# Altium PCB SR_Träger.PcbDoc
Units mm, origin at the board's own origin, x right, y up, seen from the top; angles counter-clockwise.
Board outline 89.25 x 72.75 mm, 2 copper layers (Top Layer, Bottom Layer); 53 components, 43 nets, 189 pads, 242 vias.
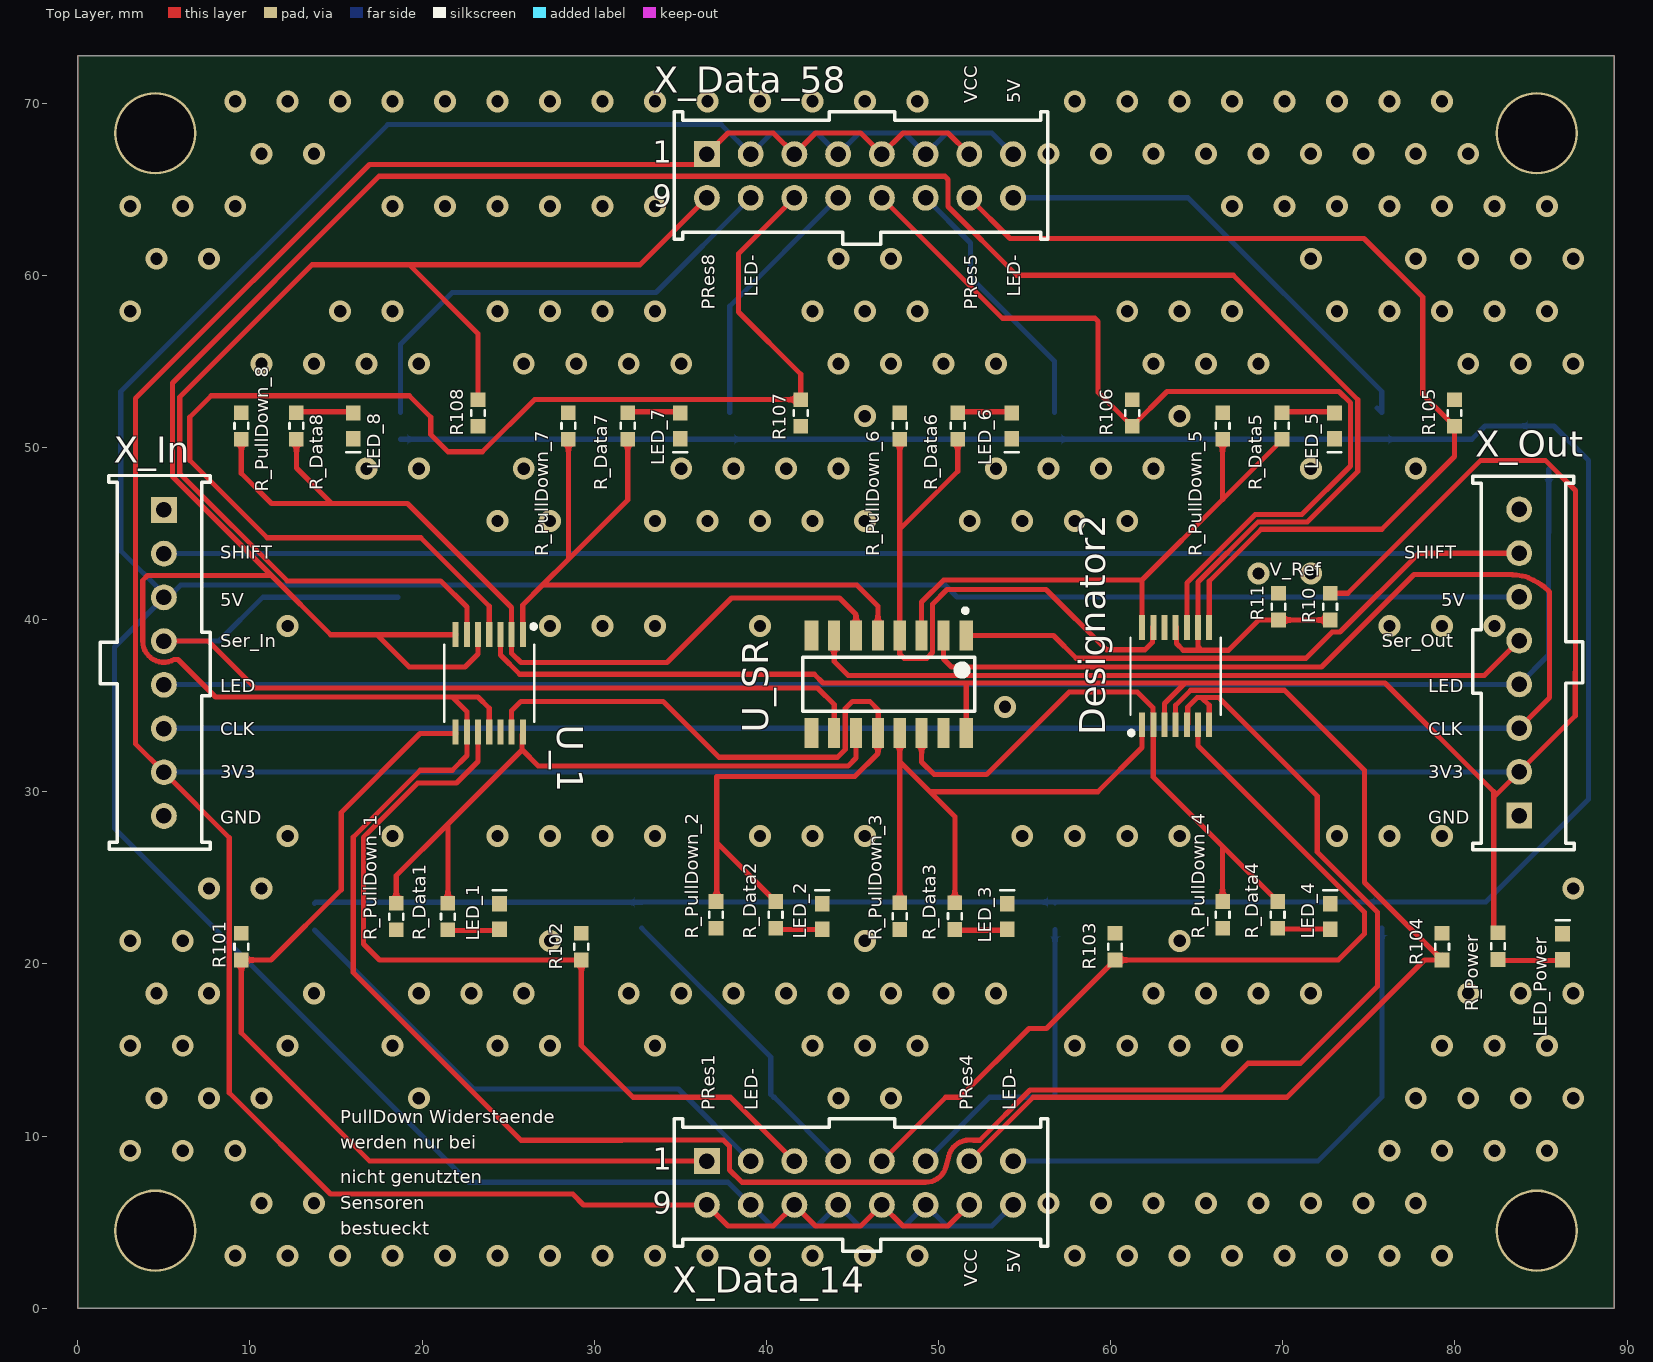
[diagram p0: Top Layer view]
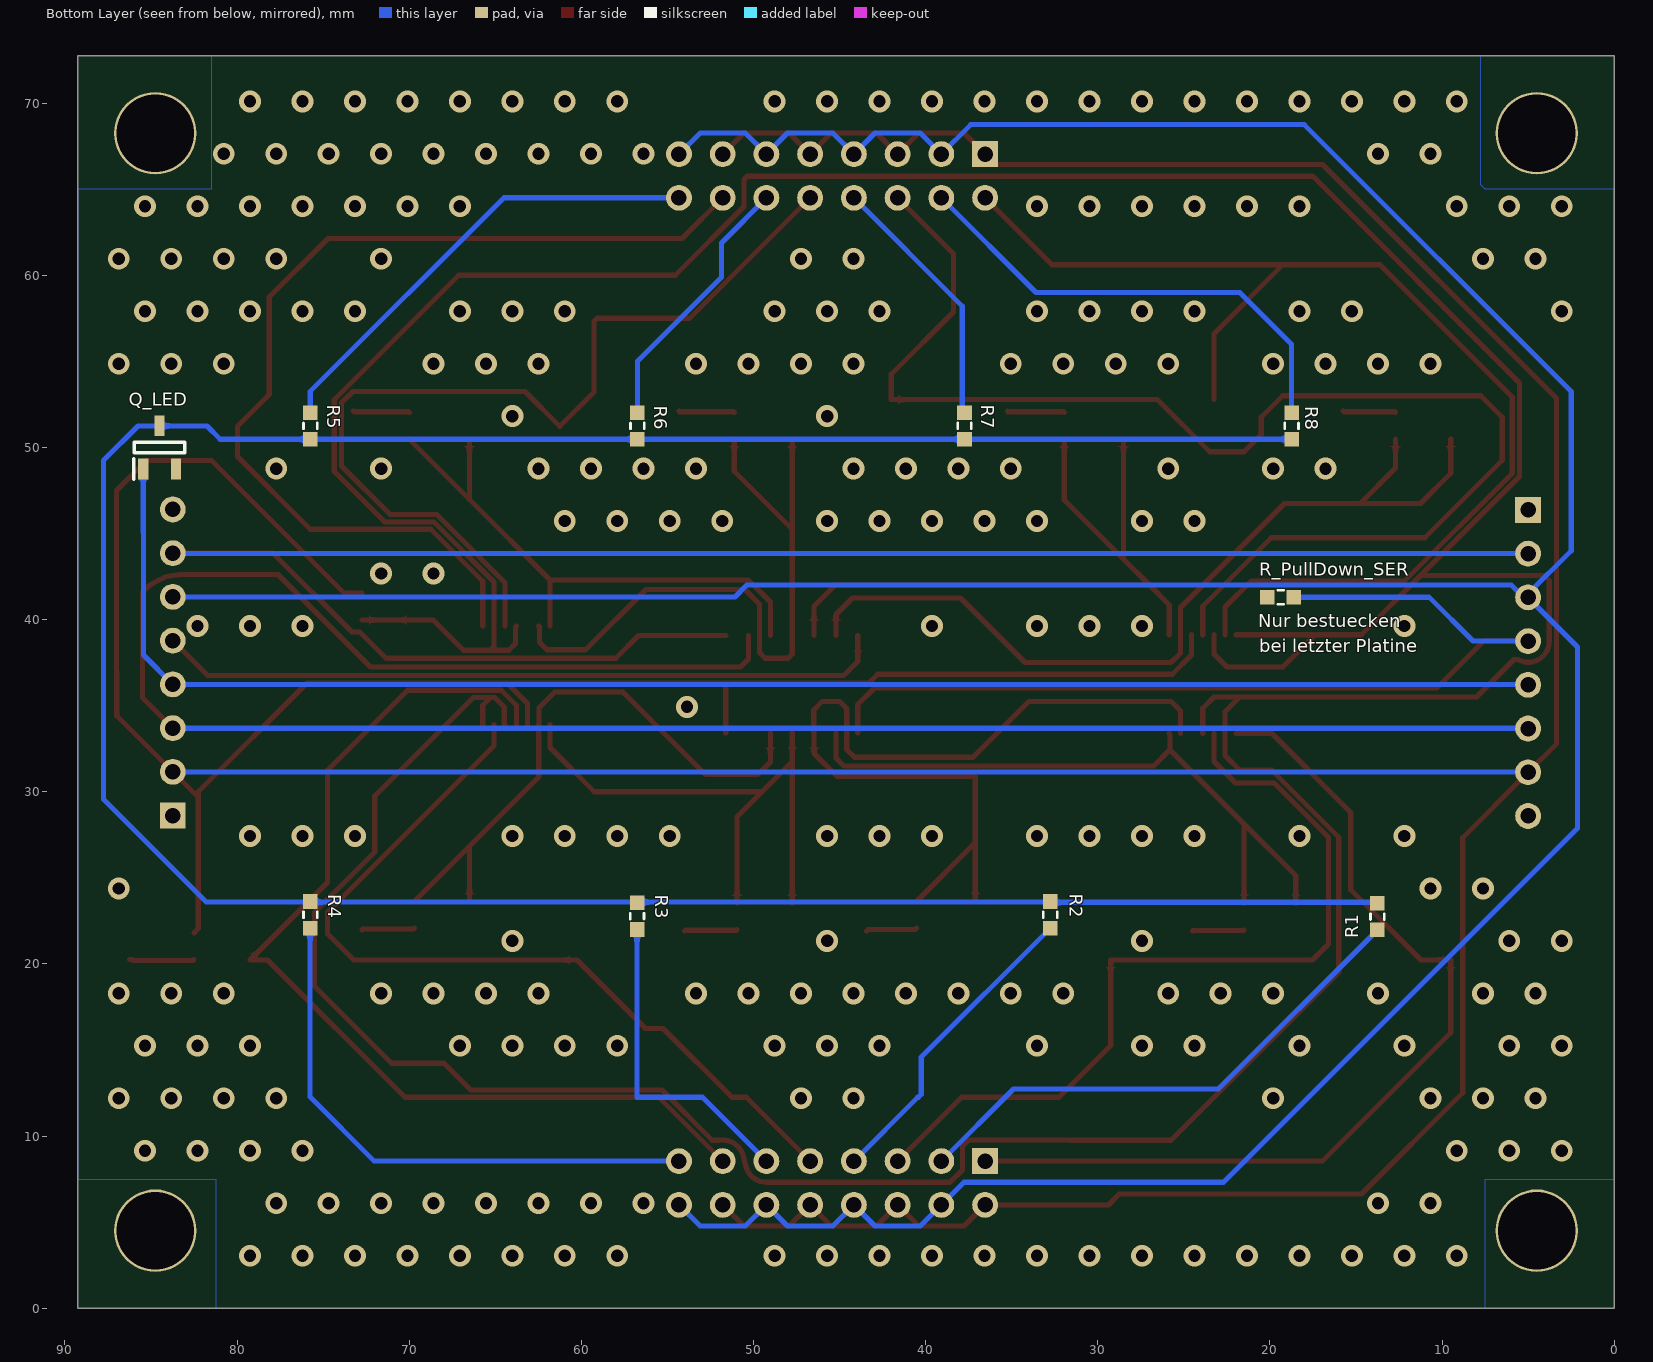
[diagram p1: Bottom Layer view, seen from below]
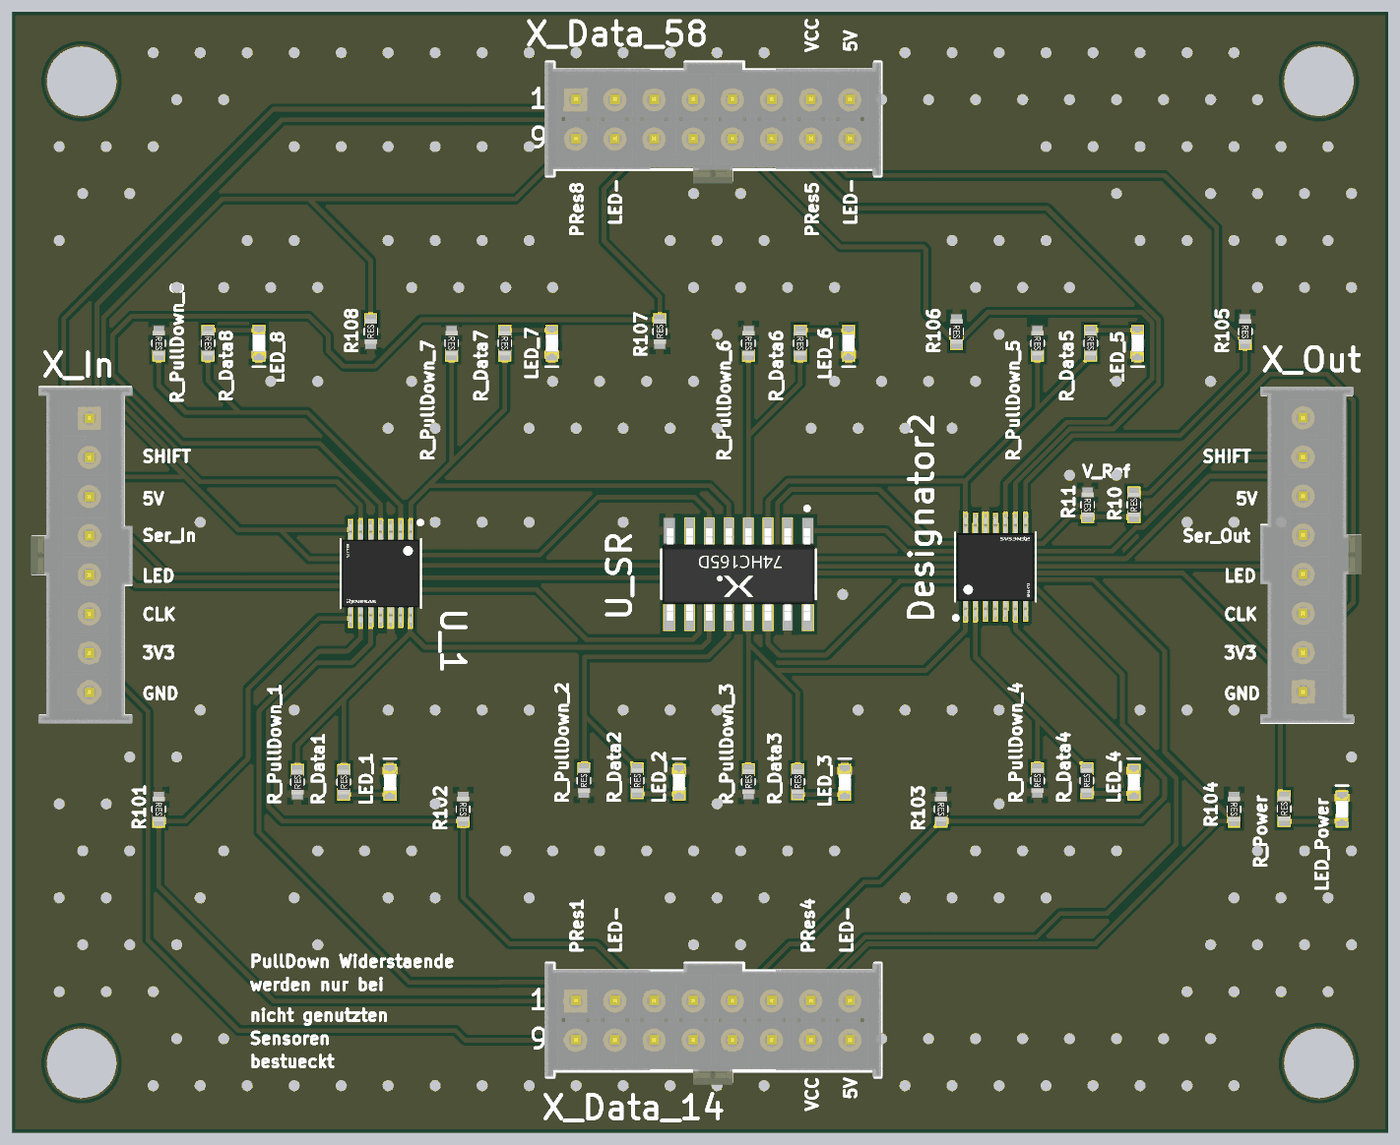
[diagram p2: 3D render of the assembled board from above, using the file's embedded part models]
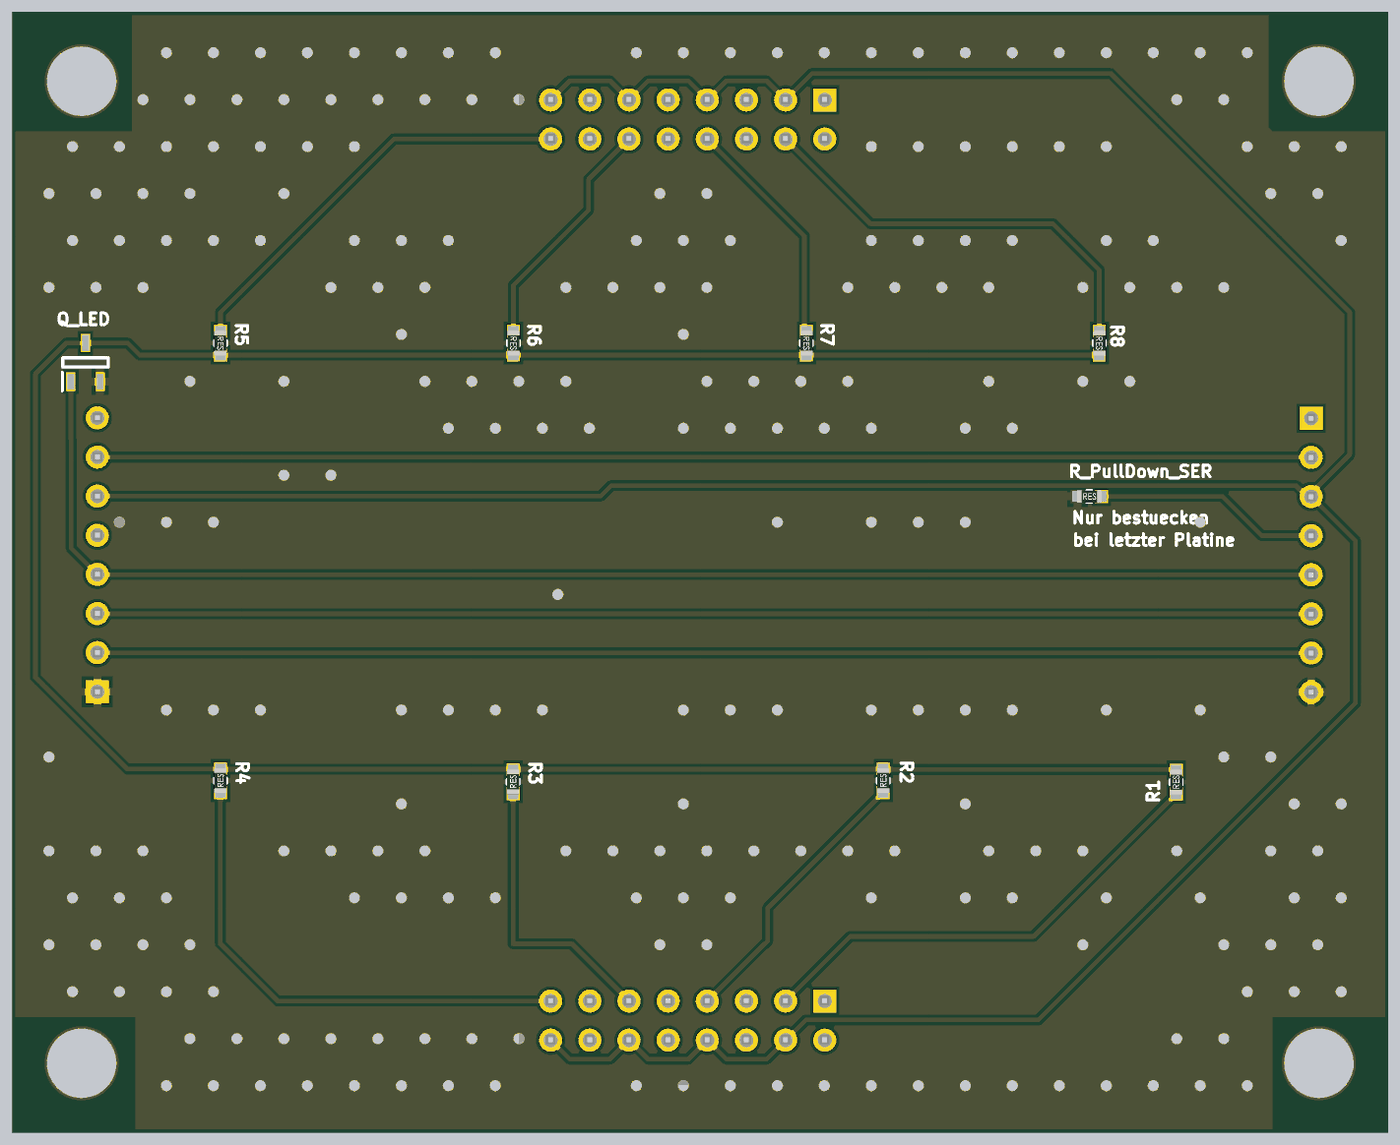
[diagram p3: 3D render of the assembled board from below, using the file's embedded part models]

## Layer stack, top to bottom
Top Solder: solder mask 0.0102, Solder Resist, Dk 3.5
Top Layer: signal copper 0.0356
Dielectric 1: dielectric 0.32, FR-4, Dk 4.8
Bottom Layer: signal copper 0.0356
Bottom Solder: solder mask 0.0102, Solder Resist, Dk 3.5

## Board outline
0,0 89.25,0 89.25,72.75 0,72.75

## Design rules (kind name [scope] priority, off if disabled: settings)
BoardOutlineClearance [All] p1: gap=0.2 ignorepadtopadclearanceinfootprint=FALSE except(0.02: Text-OutlineEdge Text-CutoutEdge; 0.4: Arc-SplitBarrior Arc-SplitContinuation Track-SplitBarrior Track-SplitContinuation SMDPad-SplitBarrior SMDPad-SplitContinuation THPad-SplitBarrior THPad-SplitContinuation Via-SplitBarrior Via-SplitContinuation Fill-SplitBarrior Fill-SplitContinuation Poly-SplitBarrior Poly-SplitContinuation Region-SplitBarrior Region-SplitContinuation Text-SplitBarrior Text-SplitContinuation)
Clearance [All] p1: gap=0.2 ignorepadtopadclearanceinfootprint=FALSE except(0.127: Arc-Arc Arc-Track Arc-SMDPad Track-Track Track-SMDPad SMDPad-SMDPad SMDPad-Via THPad-Via Via-Via; 0.254: Arc-Via Arc-Text Track-Via Track-Text SMDPad-Text THPad-Text Via-Text Fill-Text Poly-Text Region-Text Text-Text; 0.33: Arc-THPad Track-THPad; 0.5: THPad-THPad)
HoleSize [All] p1: absolutevalues=TRUE maxlimit=6.3 minlimit=0.2 maxpercent=80.000 minpercent=20.000
HoleToHoleClearance [All] p1: gap=0.5 allowstackedmicrovias=TRUE
MinimumAnnularRing [All] p1: minimumring=0.13
MinimumSolderMaskSliver [All] p1: minsoldermaskwidth=0.1
PasteMaskExpansion [All] p1: expansion=-0.08
PlaneConnect [All] p1: pad.planeconnectstyle=Relief pad.reliefexpansion=0.508 pad.reliefentries=4 pad.reliefconductorwidth=0.254 pad.reliefairgap=0.254 via.planeconnectstyle=Direct via.reliefexpansion=0.508 via.reliefentries=4 via.reliefconductorwidth=0.254 via.reliefairgap=0.254
PolygonConnect [All] p1: thpad.connectstyle=Relief thpad.reliefconductorwidth=0.508 thpad.reliefentries=4 thpad.polygonreliefangle="90 Angle" thpad.airgapwidth=0.254 smdpad.connectstyle=Relief smdpad.reliefconductorwidth=0.508 smdpad.reliefentries=4 smdpad.polygonreliefangle="90 Angle" smdpad.airgapwidth=0.254 via.connectstyle=Direct via.reliefconductorwidth=0.508 via.reliefentries=4 via.polygonreliefangle="90 Angle" via.airgapwidth=0.254
RoutingCorners [All] p1: cornerstyle=Round minsetback=2.54 maxsetback=2.54
RoutingVias [All] p1: holewidth=0.5 width=1 viastyle="Through Hole" minholewidth=0.2 minwidth=0.45 maxholewidth=1 maxwidth=2
SilkToSilkClearance [All] p1: silktosilkclearance=0.1
SilkToSolderMaskClearance [IsPad] p1: minsilkscreentomaskgap=0.1 clearancetoexposedcopper=TRUE
SolderMaskExpansion SolderMaskExpansion_VS [ViaSize < 1.0] p1: expansion=0.05 istentingtop=FALSE soldermaskfromhole=TRUE // JLC
SolderMaskExpansion [All] p2: expansion=0.05 istentingtop=FALSE useseparateexpansions=TRUE expansionbottom=0.05 istentingbottom=FALSE // JLC
UnRoutedNet [All] p1: checkbadconnections=TRUE
Width [All] p1: maxlimit=2.54 minlimit=0.2 preferedwidth=0.3 minimp=50.000000 maximp=50.000000 favimp=50.000000
21 further rules are at their usual default settings.

## Components (designator, comment, footprint, x,y, rotation, side; value= is the part's Value field where it differs from the comment)
Designator2 "Comment" M14_173_MFG 63.775,36.715 r90 top
LED_1 "150060*75000" 150060XX75000 24.5,22.75 r270 top
LED_2 "150060*75000" 150060XX75000 43.25,22.75 r270 top
LED_3 "150060*75000" 150060XX75000 54,22.75 r270 top
LED_4 "150060*75000" 150060XX75000 72.75,22.75 r270 top
LED_5 "150060*75000" 150060XX75000 73,51.25 r90 top
LED_6 "150060*75000" 150060XX75000 54.25,51.25 r90 top
LED_7 "150060*75000" 150060XX75000 35,51.25 r90 top
LED_8 "150060*75000" 150060XX75000 16,51.25 r90 top
LED_Power "150060*75000" 150060XX75000 86.25,21 r270 top
Q_LED "AO3418" SOT95P280X125-3N 84.5,50 r90 bottom
R1 "R___220" 0603_resistor_flat#1 13.758,22.75 r90 bottom value=220
R2 "R___220" 0603_resistor_flat#1 32.758,22.85 r90 bottom value=220
R3 "R___220" 0603_resistor_flat#1 56.762,22.775 r90 bottom value=220
R4 "R___220" 0603_resistor_flat#1 75.742,22.85 r90 bottom value=220
R5 "R___220" 0603_resistor_flat#1 75.742,51.25 r270 bottom value=220
R6 "R___220" 0603_resistor_flat#1 56.742,51.25 r270 bottom value=220
R7 "R___220" 0603_resistor_flat#1 37.742,51.25 r270 bottom value=220
R8 "R___220" 0603_resistor_flat#1 18.742,51.25 r270 bottom value=220
R10 "R_0603_1%_xx" 0603_resistor_flat#1 72.75,40.75 r90 top value=xx
R11 "R_0603_1%_xx" 0603_resistor_flat#2 69.75,40.75 r270 top value=xx
R101 "R___=Value" 0603_resistor_flat#2 9.5,21 r270 top
R102 "2k7" 0603_resistor_flat#2 29.25,21 r270 top
R103 "R___=Value" 0603_resistor_flat#2 60.25,21 r270 top
R104 "R___=Value" 0603_resistor_flat#2 79.25,21 r270 top
R105 "R___=Value" 0603_resistor_flat#2 79.975,52 r270 top
R106 "2k7" 0603_resistor_flat#2 61.25,52 r270 top
R107 "R___=Value" 0603_resistor_flat#2 42,52 r90 top
R108 "R___=Value" 0603_resistor_flat#2 23.25,52 r90 top
R_Data1 "R_0603_1%_3k3" 0603_resistor_flat#1 21.5,22.75 r90 top value=3k3
R_Data2 "R_0603_1%_3k3" 0603_resistor_flat#1 40.537,22.85 r90 top value=3k3
R_Data3 "R_0603_1%_3k3" 0603_resistor_flat#1 50.95,22.775 r90 top value=3k3
R_Data4 "R_0603_1%_3k3" 0603_resistor_flat#1 69.7,22.85 r90 top value=3k3
R_Data5 "R_0603_1%_3k3" 0603_resistor_flat#1 69.95,51.25 r270 top value=3k3
R_Data6 "R_0603_1%_3k3" 0603_resistor_flat#1 51.115,51.25 r270 top value=3k3
R_Data7 "R_0603_1%_3k3" 0603_resistor_flat#1 31.95,51.25 r270 top value=3k3
R_Data8 "R_0603_1%_3k3" 0603_resistor_flat#1 12.7,51.25 r270 top value=3k3
R_Power "R_0603_1%_3k3" 0603_resistor_flat#1 82.5,21.025 r90 top value=3k3
R_PullDown_1 "R___=Value" 0603_resistor_flat#2 18.5,22.75 r90 top
R_PullDown_2 "R___=Value" 0603_resistor_flat#2 37.075,22.85 r90 top
R_PullDown_3 "R___=Value" 0603_resistor_flat#2 47.75,22.775 r90 top
R_PullDown_4 "R___=Value" 0603_resistor_flat#2 66.5,22.85 r90 top
R_PullDown_5 "R___=Value" 0603_resistor_flat#2 66.5,51.25 r270 top
R_PullDown_6 "R___=Value" 0603_resistor_flat#2 47.75,51.25 r270 top
R_PullDown_7 "R___=Value" 0603_resistor_flat#2 28.5,51.25 r270 top
R_PullDown_8 "R___=Value" 0603_resistor_flat#2 9.5,51.25 r270 top
R_PullDown_SER "R___=Value" 0603_resistor_flat#2 19.383,41.3 r180 bottom
U_1 "Comment" M14_173_MFG 23.902,36.295 r270 top
U_SR "74HC165D,653" FP-SOT109-1-MFG 47.113,36.245 r270 top
X_Data_14 "Samtec-IPL1-108-01-L-D-K" Samtec-IPL1-108-01-L-D-K 45.437,7.27 r0 top value=Samtec
X_Data_58 "Samtec-IPL1-108-01-L-D-K" Samtec-IPL1-108-01-L-D-K 45.437,65.77 r0 top value=Samtec
X_In "Samtec-IPL1-108-01-L-S-K" Samtec-IPL1-108-01-L-S-K 5,37.48 r270 top
X_Out "Samtec-IPL1-108-01-L-S-K" Samtec-IPL1-108-01-L-S-K 83.732,37.506 r90 top

## Footprints (in the part's own frame and the unit in brackets; to place one, negate y for a bottom-side part, rotate by r counter-clockwise, add the part's x,y. Pads: shape width x height; smd on the part's side, far side on the other; paste and mask are expansions set on the pad)
0603_resistor_flat#1 [mm] "0603, Resistor, flat"
  rect 0.85x0.85 smd: 1(-0.775,0) 2(0.775,0)
  silkscreen extent -0.17,-0.4 0.17,0.4, body extent -0.8,-0.4 0.8,0.4, height 0.3
0603_resistor_flat#2 [mm] "0603, Resistor, flat"
  rect 0.85x0.85 smd mask+0.05: 1(-0.775,0)
  rect 0.85x0.85 smd: 2(0.775,0)
  silkscreen extent -0.17,-0.4 0.17,0.4, body extent -0.8,-0.4 0.8,0.4, height 0.3
150060XX75000 [mm] "LED_0603"
  rect 0.9x0.85 smd: 1(-0.75,0) 2(0.75,0)
  silkscreen extent -1.52,-0.4 -1.52,0.4, body extent -0.8,-0.4 0.8,0.4, height 0.7
FP-SOT109-1-MFG [mm]
  rect 1.75x0.8 smd paste-1000 mask+0.05: 1(-2.825,4.495) 8(-2.825,-4.495)
  rect 1.75x0.7 smd paste-1000 mask+0: 2(-2.825,3.175) 3(-2.825,1.905) 4(-2.825,0.635) 5(-2.825,-0.635) 6(-2.825,-1.905) 7(-2.825,-3.175) 10(2.825,-3.175) 11(2.825,-1.905) 12(2.825,-0.635) 13(2.825,0.635) 14(2.825,1.905)
  rect 1.75x0.8 smd paste-1000 mask+0: 9(2.825,-4.495) 16(2.825,4.495)
  rect 1.75x0.7 smd paste-1000 mask+0.05: 15(2.825,3.175)
  silkscreen extent -4.4,-5 1.58,5, body extent -3.83,-5.95 3.83,5.95, height 0.25
M14_173_MFG [mm] "Recommended Land Pattern"
  rect 1.45x0.35 smd: 1(-2.825,1.95) 2(-2.825,1.3) 3(-2.825,0.65) 4(-2.825,0) 5(-2.825,-0.65) 6(-2.825,-1.3) 7(-2.825,-1.95) 8(2.825,-1.95) 9(2.825,-1.3) 10(2.825,-0.65) 11(2.825,0) 12(2.825,0.65) 13(2.825,1.3) 14(2.825,1.95)
  silkscreen extent -3.43,-2.61 2.25,2.7, body extent -3.65,-2.8 3.65,2.8, height 0.25
Samtec-IPL1-108-01-L-D-K [mm]
  rect 1.5x1.5 hole 0.9: 1(-8.89,1.27)
  round 1.5 hole 0.9: 2(-6.35,1.27) 3(-3.81,1.27) 4(-1.27,1.27) 5(1.27,1.27) 6(3.81,1.27) 7(6.35,1.27) 8(8.89,1.27) 9(-8.89,-1.27) 10(-6.35,-1.27) 11(-3.81,-1.27) 12(-1.27,-1.27) 13(1.27,-1.27) 14(3.81,-1.27) 15(6.35,-1.27) 16(8.89,-1.27)
  silkscreen extent -10.79,-3.97 10.91,3.73, body extent -10.91,-4.16 10.93,3.71, height 8.14
Samtec-IPL1-108-01-L-S-K [mm]
  rect 1.5x1.5 hole 0.9: 1(-8.89,0)
  round 1.5 hole 0.9: 2(-6.35,0) 3(-3.81,0) 4(-1.27,0) 5(1.27,0) 6(3.81,0) 7(6.35,0) 8(8.89,0)
  silkscreen extent -10.89,-3.7 10.81,2.7, body extent -10.91,-3.8 10.93,2.8, height 8.14
SOT95P280X125-3N [mm]
  rect 1.2x0.6 smd: 1(-1.25,0.95) 2(-1.25,-0.95) 3(1.25,0)
  silkscreen extent -1.85,-1.48 0.3,1.5

## Part data
LED_1 LED_2 LED_3 LED_4 LED_5 LED_6 LED_7 LED_8 LED_Power: library part LED_0603, "0603 SMD mono-color Chip LED, WL-SMCW / BS: Blue, GS: Green, RS: Red, SS: super red, VS: bright green, YS: yellow", Case_EIA=0603, Manufacturer=Würth, possible_colors="BS, GS, RS, SS, VS, YS", Part Number=150060*75000
Q_LED: "MOSFET N-CH 30V 3.8A SOT23", Manufacturer_Name="Alpha & Omega Semiconductors", Arrow Part Number=AO3418, Arrow Price/Stock=https://www.arrow.com/en/products/ao3418/alpha-and-omega-semiconductor, Datasheet Link=https://www.arrow.com/en/products/ao3418/alpha-and-omega-semiconductor, Geometry.Height=1.25mm, Manufacturer_Part_Number=AO3418
R1 R2 R3 R4 R5 R6 R7 R8: library part R_0603, "Resistor, 0603, 5% default, 0.1 W", Case_Metric=1608, Power_Dissipation=100mW, E12="1K0, 1K2, 1K5, 1K8, 2K2, 2K7, 3K3, 3K9, 4K7, 5K6, 6K8, 8K2", Part Number=R___220
R10 R11 R_Data1 R_Data2 R_Data3 R_Data4 R_Data5 R_Data6 R_Data7 R_Data8 R_Power: library part R_0603, "Resistor, 0603, 5% default, 0.1 W", Case_EIA=0603, Case_Metric=1608, Power_Dissipation=100mW, Tolerance=1%, E12="1K0, 1K2, 1K5, 1K8, 2K2, 2K7, 3K3, 3K9, 4K7, 5K6, 6K8, 8K2"
  R10 R11: Part Number=R_0603_1%_xx
  R_Data1 R_Data2 R_Data3 R_Data4 R_Data5 R_Data6 R_Data7 R_Data8 R_Power: Part Number=R_0603_1%_3k3
R101 R102 R103 R104 R105 R106 R107 R108 R_PullDown_1 R_PullDown_2 R_PullDown_3 R_PullDown_4 R_PullDown_5 R_PullDown_6 R_PullDown_7 R_PullDown_8 R_PullDown_SER: library part R_0603, "Resistor, 0603, 5% default, 0.1 W", Case_Metric=1608, Part Number=R___=Value, Power_Dissipation=100mW, E12="1K0, 1K2, 1K5, 1K8, 2K2, 2K7, 3K3, 3K9, 4K7, 5K6, 6K8, 8K2"
U_SR: library part CMP-14351-000001-1, "IC SHIFT REGST 8BIT PI-SO 16SOIC", Ambient Temperature Range High=+125°C, Ambient Temperature Range Low=-40°C, Frequency=61MHz, Manufacturer=Nexperia, Max Supply Voltage=6V, Min Supply Voltage=2V, Nominal Supply Current=8uA, Package=SOT109-1, Temperature="-40°C to +125°C", Automotive=No, Category=IC, ComponentLink2Description=Datasheet, ComponentLink2URL=https://assets.nexperia.com/documents/data-sheet/74HC_HCT165.pdf, Device Class L1="Integrated Circuits (ICs)", Device Class L2="Logic ICs", Device Class L3="Shift Registers", Digikey Description="IC SHIFT REGST 8BIT PI-SO 16SOIC", Footprint Url=https://assets.nexperia.com/documents/outline-drawing/SOT109-1.pdf, Height=1.75mm, Ipc Land Pattern Name=SOP127P600X175-16, Lead Free=Yes, Logic Function Desc="Shift Register", Manufacturer Part Number=74HC165D,653, Number Of Circuits=1, Number Of Inputs=8, Number Of Outputs=1, Octopart=https://octopart.com/74hc165d%2C653-nexperia-78737091, Propagation Delay=15ns, RoHS=TRUE, Standoff Height=0.1mm, Temperature Range High=+125°C, Temperature Range Low=-40°C
X_Data_14 X_Data_58: "Header, 8-Pin, Dual row", LatestRevisionDate=17-Jul-2002, LatestRevisionNote="Re-released for DXP Platform.", Publisher="Altium Limited"
X_In X_Out: library part IPL1-108-01-L-S-K, "Header, 8-Pin", LatestRevisionDate=17-Jul-2002, LatestRevisionNote="Re-released for DXP Platform.", Publisher="Altium Limited"

## Free pads (board coordinates)
  round 4.8 hole 4.5 mask+0.05: 7(4.5,68.25) 8(84.75,68.25) 9(84.75,4.5) 10(4.5,4.5)

## Via types
v1: diameter 1.27, hole 0.711, Top Layer to Bottom Layer, tented both sides, 242 vias

## Nets (pads, with @x,y where several pads share a name; then routed paths per layer and width w, separated by ;. In a path a pad name is that pad's centre, name@x,y a point inside that pad or via, vN(x,y) a via of type N, cw(c..) or ccw(c..) an arc to the next point about the centre after c; other vN are vias at no path point)
5V: X_Data_14.10 X_Data_14.12 X_Data_14.14 X_Data_14.16 X_Data_58.2 X_Data_58.4 X_Data_58.6 X_Data_58.8 X_In.3 X_Out.6 | length 233.2
  Bottom Layer w0.3: X_Data_14.16 53.097,4.77 50.477,4.77 X_Data_14.14 48.017,4.77 45.397,4.77 X_Data_14.12 42.937,4.77 40.317,4.77 X_Data_14.10 37.777,7.31 22.69,7.31 2.124,27.876 2.124,38.414 X_In.3 ; X_Data_58.8 53.097,68.27 50.477,68.27 X_Data_58.6 48.017,68.27 45.397,68.27 X_Data_58.4 42.937,68.27 40.317,68.27 X_Data_58.2 37.377,68.75 18,68.75 2.5,53.25 2.5,44 5,41.5 X_In.3 ; X_Out.6 51.08,41.316 50.395,42.002 5.985,42.002 5.273,41.29 X_In.3
CLK: U_SR.2 X_In.6 X_Out.3 | length 126.6
  Top Layer w0.3: U_SR.2 50.288,37.712 50.75,37.25 72.25,37.25 77.614,42.614 83.105,42.614 cw(c83.105,39.255) 83.581,42.58 83.906,42.534 cw(c83.732,41.316) 84.264,42.425 84.56,42.283 cw(c83.105,39.255) 85.406,41.703 cw(c85.2,41.485) 85.5,41.485 85.5,35.465 X_Out.3
  Bottom Layer w0.3: X_In.6 5.013,33.683 83.718,33.683 X_Out.3
GND: LED_1.1 LED_2.1 LED_3.1 LED_4.1 LED_5.1 LED_6.1 LED_7.1 LED_8.1 LED_Power.1 Q_LED.2 R11.1 R101.1 R102.1 R103.1 R104.1 R105.1 R106.1 R107.1 R108.1 R_PullDown_1.1 R_PullDown_2.1 R_PullDown_3.1 R_PullDown_4.1 R_PullDown_5.1 R_PullDown_6.1 R_PullDown_7.1 R_PullDown_8.1 R_PullDown_SER.1 U_SR.8 U_SR.15 X_In.8 X_Out.1 | length 0
  Bottom Layer w0.3: X_Out.1@83.705,28.59 X_Out.1
  other v1: 9.144,3.048 12.192,3.048 15.24,3.048 18.288,3.048 21.336,3.048 24.384,3.048 27.432,3.048 30.48,3.048 33.528,3.048 36.576,3.048 39.624,3.048 42.672,3.048 45.72,3.048 48.768,3.048 57.912,3.048 60.96,3.048 64.008,3.048 67.056,3.048 70.104,3.048 73.152,3.048 76.2,3.048 79.248,3.048 10.668,6.096 13.716,6.096 56.388,6.096 59.436,6.096 62.484,6.096 65.532,6.096 68.58,6.096 71.628,6.096 74.676,6.096 77.724,6.096 3.048,9.144 6.096,9.144 9.144,9.144 76.2,9.144 79.248,9.144 82.296,9.144 85.344,9.144 4.572,12.192 7.62,12.192 10.668,12.192 19.812,12.192 44.196,12.192 47.244,12.192 77.724,12.192 80.772,12.192 83.82,12.192 86.868,12.192 3.048,15.24 6.096,15.24 12.192,15.24 18.288,15.24 24.384,15.24 27.432,15.24 33.528,15.24 42.672,15.24 45.72,15.24 48.768,15.24 57.912,15.24 60.96,15.24 64.008,15.24 67.056,15.24 79.248,15.24 82.296,15.24 85.344,15.24 4.572,18.288 7.62,18.288 13.716,18.288 19.812,18.288 22.86,18.288 25.908,18.288 32.004,18.288 35.052,18.288 38.1,18.288 41.148,18.288 44.196,18.288 47.244,18.288 50.292,18.288 53.34,18.288 62.484,18.288 65.532,18.288 68.58,18.288 71.628,18.288 80.772,18.288 83.82,18.288 86.868,18.288 3.048,21.336 6.096,21.336 27.432,21.336 45.72,21.336 64.008,21.336 7.62,24.384 10.668,24.384 86.868,24.384 12.192,27.432 18.288,27.432 24.384,27.432 27.432,27.432 30.48,27.432 33.528,27.432 39.624,27.432 42.672,27.432 45.72,27.432 54.864,27.432 57.912,27.432 60.96,27.432 64.008,27.432 73.152,27.432 76.2,27.432 79.248,27.432 53.864,34.932 12.192,39.624 27.432,39.624 30.48,39.624 33.528,39.624 39.624,39.624 76.2,39.624 79.248,39.624 82.296,39.624 68.58,42.672 71.628,42.672 24.384,45.72 27.432,45.72 33.528,45.72 36.576,45.72 39.624,45.72 42.672,45.72 45.72,45.72 51.816,45.72 54.864,45.72 57.912,45.72 60.96,45.72 16.764,48.768 19.812,48.768 25.908,48.768 35.052,48.768 38.1,48.768 41.148,48.768 44.196,48.768 53.34,48.768 56.388,48.768 59.436,48.768 62.484,48.768 71.628,48.768 77.724,48.768 45.72,51.816 64.008,51.816 10.668,54.864 13.716,54.864 16.764,54.864 19.812,54.864 25.908,54.864 28.956,54.864 32.004,54.864 35.052,54.864 44.196,54.864 47.244,54.864 50.292,54.864 53.34,54.864 62.484,54.864 65.532,54.864 68.58,54.864 80.772,54.864 83.82,54.864 86.868,54.864 3.048,57.912 15.24,57.912 18.288,57.912 24.384,57.912 27.432,57.912 30.48,57.912 33.528,57.912 42.672,57.912 45.72,57.912 48.768,57.912 60.96,57.912 64.008,57.912 67.056,57.912 73.152,57.912 76.2,57.912 79.248,57.912 82.296,57.912 85.344,57.912 4.572,60.96 7.62,60.96 44.196,60.96 47.244,60.96 71.628,60.96 77.724,60.96 80.772,60.96 83.82,60.96 86.868,60.96 3.048,64.008 6.096,64.008 9.144,64.008 18.288,64.008 21.336,64.008 24.384,64.008 27.432,64.008 30.48,64.008 33.528,64.008 67.056,64.008 70.104,64.008 73.152,64.008 76.2,64.008 79.248,64.008 82.296,64.008 85.344,64.008 10.668,67.056 13.716,67.056 56.388,67.056 59.436,67.056 62.484,67.056 65.532,67.056 68.58,67.056 71.628,67.056 74.676,67.056 77.724,67.056 80.772,67.056 9.144,70.104 12.192,70.104 15.24,70.104 18.288,70.104 21.336,70.104 24.384,70.104 27.432,70.104 30.48,70.104 33.528,70.104 36.576,70.104 39.624,70.104 42.672,70.104 45.72,70.104 48.768,70.104 57.912,70.104 60.96,70.104 64.008,70.104 67.056,70.104 70.104,70.104 73.152,70.104 76.2,70.104 79.248,70.104
LED1: R1.1 X_Data_14.2 | length 30.9
  Bottom Layer w0.3: R1.1 23,12.733 34.894,12.733 X_Data_14.2
LED2: R2.1 X_Data_14.4 | length 18.3
  Bottom Layer w0.3: R2.1 40.25,14.583 40.25,12.426 40.426,12.25 40.457,12.25 X_Data_14.4
LED3: R3.1 X_Data_14.6 | length 18.8
  Bottom Layer w0.3: X_Data_14.6 52.957,12.25 56.762,12.25 R3.1
LED4: R4.1 X_Data_14.8 | length 32.8
  Bottom Layer w0.3: X_Data_14.8 72.032,8.54 75.752,12.26 75.752,22.065 R4.1
LED5: R5.1 X_Data_58.16 | length 27.7
  Bottom Layer w0.3: X_Data_58.16 64.5,64.5 75.742,53.258 R5.1 R5.1@75.467,52.3
LED6: R6.1 X_Data_58.14 | length 15.6
  Bottom Layer w0.3: X_Data_58.14 51.865,61.882 51.865,59.885 56.742,55.008 R6.1
LED7: R7.1 X_Data_58.12 | length 15.1
  Bottom Layer w0.3: R7.1@37.869,52.025 37.869,58.202 X_Data_58.12
LED8: R8.1 X_Data_58.10 | length 27.8
  Bottom Layer w0.3: R8.1 18.742,55.992 21.75,59 33.587,59 X_Data_58.10
LED_Data_1: R_Data1.2 R_PullDown_1.2 U_1.14 U_SR.11 | length 38.9
  Top Layer w0.3: R_PullDown_1.2 18.5,25.125 21.5,28.125 ; R_Data1.2 21.5,28.125 ; U_1.14@25.852,33.38 25.797,33.325 25.797,32.422 ; U_SR.11 45.208,31.958 44.75,31.5 26.75,31.5 25.828,32.422 25.797,32.422 ; 21.5,28.125 25.797,32.422
LED_Data_2: R_Data2.2 R_PullDown_2.2 U_1.13 U_SR.12 | length 51.7
  Top Layer w0.3: U_1.13@25.202,33.38 25.202,34.702 25.75,35.25 34,35.25 37.25,32 44.135,32 44.581,32.446 44.581,34.831 45,35.25 46,35.25 46.5,34.75 46.5,33.442 U_SR.12 46.478,32.228 45.135,30.885 37.115,30.885 37.115,27.047 ; R_PullDown_2.2@37.115,23.625 37.115,27.047 ; R_Data2.2 37.115,27.047
LED_Data_3: Designator2.1 R_Data3.2 R_PullDown_3.2 U_SR.13 | length 34.1
  Top Layer w0.3: U_SR.13 47.748,31.752 47.75,31.75 ; R_PullDown_3.2 47.75,31.75 ; R_Data3.2 50.95,28.55 49.5,30 ; Designator2.1 61.825,32.575 59.25,30 49.5,30 ; 47.75,31.75 49.5,30
LED_Data_4: Designator2.2 R_Data4.2 R_PullDown_4.2 U_SR.14 | length 35.2
  Top Layer w0.3: U_SR.14 49.018,31.732 49.75,31 52.796,31 57.596,35.8 61.545,35.8 62.467,34.878 62.467,33.898 Designator2.2 62.475,30.85 66.537,26.787 ; R_PullDown_4.2 66.5,26.75 66.537,26.787 ; R_Data4.2 66.537,26.787
LED_Data_5: Designator2.14 R_Data5.2 R_PullDown_5.2 U_SR.3 | length 33
  Top Layer w0.3: U_SR.3 49.018,41.018 50.3,42.3 61.825,42.3 ; Designator2.14@61.825,39.63 61.825,42.3 ; R_PullDown_5.2 66.5,47 66.513,46.988 ; R_Data5.2@70,50.475 66.513,46.988 ; 61.825,42.3 66.513,46.988
LED_Data_6: Designator2.13 R_Data6.2 R_PullDown_6.2 U_SR.4 | length 39.8
  Top Layer w0.3: R_PullDown_6.2 R_PullDown_6.2 47.749,45.25 ; R_Data6.2 51.115,48.616 47.749,45.25 ; Designator2.13@62.475,39.63 62.429,39.585 62.429,38.679 62,38.25 59.75,38.25 56.25,41.75 50.5,41.75 49.645,40.895 49.645,38.08 49.315,37.75 48,37.75 47.75,38 47.75,39.068 U_SR.4 47.749,39.071 47.749,45.25
LED_Data_7: R_Data7.2 R_PullDown_7.2 U_1.1 U_SR.5 | length 42.5
  Top Layer w0.3: U_1.1 25.852,40.852 27,42 ; R_PullDown_7.2 28.5,43.5 ; R_Data7.2 31.95,46.95 28.5,43.5 ; U_SR.5 46.478,40.772 45.25,42 27,42 ; 27,42 28.5,43.5
LED_Data_8: R_Data8.2 R_PullDown_8.2 U_1.2 U_SR.6 | length 51.5
  Top Layer w0.3: R_PullDown_8.2 9.5,48.5 11.25,46.75 14.75,46.75 ; R_Data8.2 12.7,48.8 14.75,46.75 ; U_SR.6 45.208,40.292 44.25,41.25 37.973,41.25 34.223,37.5 25.75,37.5 25.202,38.048 U_1.2 25.202,40.698 19.15,46.75 14.75,46.75
LED_Enable: Q_LED.1 X_In.5 X_Out.4 | length 92
  Bottom Layer w0.3: X_In.5 5.013,36.223 83.718,36.223 X_Out.4 85.43,37.935 85.43,45.029 85.45,45.049 Q_LED.1
LED_In: Q_LED.3 R1.2 R2.2 R3.2 R4.2 R5.2 R6.2 R7.2 R8.2 | length 166.4
  Bottom Layer w0.3: R1.2 13.808,23.575 32.783,23.575 32.795,23.587 56.724,23.587 R3.2 56.799,23.587 75.704,23.587 R4.2 75.768,23.599 81.788,23.599 87.75,29.561 87.75,49.25 85.75,51.25 Q_LED.3 81.75,51.25 80.975,50.475 R5.2 R6.2 R7.2 R8.2
NetLED_1_2: LED_1.2 R_Data1.1 | length 3
  Top Layer w0.3: R_Data1.1 21.538,21.937 24.462,21.937 LED_1.2@24.5,21.9
NetLED_2_2: LED_2.2 R_Data2.1 | length 3
  Top Layer w0.3: R_Data2.1 40.625,21.987 43.337,21.987 LED_2.2@43.425,21.9
NetLED_3_2: LED_3.2 R_Data3.1 | length 3.1
  Top Layer w0.3: R_Data3.1 51,21.95 53.95,21.95 LED_3.2@54,21.9
NetLED_4_2: LED_4.2 R_Data4.1 | length 3.1
  Top Layer w0.3: R_Data4.1 69.75,22.025 72.7,22.025 LED_4.2@72.75,21.975
NetLED_5_2: LED_5.2 R_Data5.1 | length 3.3
  Top Layer w0.3: R_Data5.1@70,52.025 70.05,52.075 73.2,52.075 LED_5.2@73.25,52.125
NetLED_6_2: LED_6.2 R_Data6.1 | length 3.3
  Top Layer w0.3: R_Data6.1 51.165,52.075 54.28,52.075 LED_6.2@54.33,52.125
NetLED_7_2: LED_7.2 R_Data7.1 | length 3.3
  Top Layer w0.3: R_Data7.1 32,52.075 35.2,52.075 LED_7.2@35.25,52.125
NetLED_8_2: LED_8.2 R_Data8.1 | length 3.1
  Top Layer w0.3: R_Data8.1 12.75,52.075 15.7,52.075 LED_8.2@15.75,52.125
NetLED_Power_2: LED_Power.2 R_Power.1 | length 3.8
  Top Layer w0.3: R_Power.1 82.55,20.2 86.05,20.2 86.1,20.25 LED_Power.2
R_Photo_1: R101.2 U_1.8 X_Data_14.1 | length 54.9
  Top Layer w0.3: U_1.8@21.952,33.38 19.88,33.38 15.3,28.8 15.3,24.3 11.225,20.225 R101.2 9.5,16 16.96,8.54 X_Data_14.1
R_Photo_2: R102.2 U_1.10 X_Data_14.3 | length 49.5
  Top Layer w0.3: U_1.10@23.252,33.38 23.252,31.752 22,30.5 19.75,30.5 16.6,27.35 16.6,21.15 17.525,20.225 R102.2 29.25,15.25 32.25,12.25 37.917,12.25 X_Data_14.3
R_Photo_3: Designator2.6 R103.2 X_Data_14.5 | length 49.7
  Top Layer w0.3: X_Data_14.5 50.417,12.25 51.25,12.25 55.254,16.254 56.279,16.254 R103.2 73.225,20.225 74.75,21.75 74.75,23 65.075,32.675 Designator2.6
R_Photo_4: Designator2.4 R104.2 X_Data_14.7 | length 59.6
  Top Layer w0.3: X_Data_14.7 55.497,12.25 70.25,12.25 78.225,20.225 R104.2 74.75,24.725 74.75,31.25 70.104,35.896 64.646,35.896 63.775,35.025 Designator2.4
R_Photo_5: Designator2.8 R105.2 X_Data_58.15 | length 58.6
  Top Layer w0.3: X_Data_58.15 54.152,62.135 74.724,62.135 78.128,58.73 78.128,53.071 R105.2 79.975,49.475 75.75,45.25 68.75,45.25 65.725,42.225 Designator2.8@65.725,39.63
R_Photo_6: Designator2.10 R106.2 X_Data_58.13 | length 54.7
  Top Layer w0.3: X_Data_58.13 53.707,57.5 59.09,57.5 59.266,57.324 59.266,53.209 R106.2 63.275,53.25 73.267,53.25 73.927,52.59 73.927,48.927 71.104,46.104 68.396,46.104 64.425,42.132 Designator2.10@64.425,39.63
R_Photo_7: R107.2 U_1.4 X_Data_58.11 | length 78.8
  Top Layer w0.3: U_1.4 23.902,40.773 19.925,44.75 11,44.75 6.5,49.25 6.5,51.75 7.75,53 19.25,53 20.5,51.75 20.5,50.75 21.5,49.75 23.5,49.75 26.525,52.775 R107.2 42,54.25 38.377,57.873 38.377,61.25 X_Data_58.11
R_Photo_8: R108.2 U_1.6 X_Data_58.9 | length 70.8
  Top Layer w0.3: U_1.6 22.602,40.723 21.075,42.25 12.168,42.25 5.927,48.491 5.927,52.927 13.609,60.609 19.25,60.609 ; R108.2 23.25,56.609 19.25,60.609 ; X_Data_58.9 32.656,60.609 19.25,60.609
Serial_in: R_PullDown_SER.2 U_SR.10 X_In.4 | length 56.8
  Top Layer w0.3: X_In.4 7.58,38.75 10.307,36.023 42.977,36.023 43.938,35.062 U_SR.10
  Bottom Layer w0.3: X_In.4 8.2,38.75 10.75,41.3 R_PullDown_SER.2
Serial_Out: U_SR.7 X_Out.5 | length 42.5
  Top Layer w0.3: U_SR.7 43.938,37.562 44.75,36.75 81.705,36.75 X_Out.5
Serial_Shift: U_SR.1 X_In.2 X_Out.7 | length 113.9
  Top Layer w0.3: U_SR.1 56.68,39.07 58,37.75 71.346,37.75 72.869,39.273 73.321,39.273 77.904,43.856 X_Out.7
  Bottom Layer w0.3: X_In.2 5.013,43.843 83.718,43.843 X_Out.7
V_Ref: Designator2.5 Designator2.7 Designator2.9 Designator2.11 R10.1 R11.2 U_1.5 U_1.7 U_1.9 U_1.11 | length 295.6
  Top Layer w0.3: U_1.7 17.38,39.12 ; U_1.5 23.252,38.002 22.5,37.25 19.25,37.25 17.38,39.12 ; U_1.11@23.902,33.38 23.902,34.848 23.25,35.5 21.75,35.5 ; Designator2.11@63.775,39.63 63.83,39.575 63.83,38.608 64.218,38.219 65.292,38.219 ; Designator2.5 64.48,33.945 64.48,34.916 65.032,35.469 65.281,35.469 ; Designator2.7 65.725,35.025 65.281,35.469 ; R10.1 R11.2 68.6,39.975 66.844,38.219 65.292,38.219 ; 11.254,42.56 5.5,48.314 5.5,53.75 17.5,65.75 50.377,65.75 50.557,65.57 50.557,63.991 54.548,60 67.121,60 74.354,52.767 74.354,48.604 71.427,45.677 68.573,45.677 65.075,42.178 65.075,39.63 65.075,38.437 65.292,38.219 ; 11.254,42.56 4.051,42.56 3.77,42.279 3.77,38.75 ccw(c5,38.75) 5.615,37.685 5.815,37.685 8,35.5 21.75,35.5 ; 11.254,42.56 14.694,39.12 17.38,39.12 ; 21.75,35.5 22.602,34.648 22.602,33.38 22.602,32.102 21.75,31.25 19.896,31.25 16,27.354 16,19.5 25.75,9.75 31.613,9.75 31.633,9.77 37.496,9.77 37.857,9.409 37.857,8.031 38.578,7.31 49.247,7.31 ccw(c49.247,8.54) 50.438,8.234 50.596,8.846 cw(c51.787,8.54) 51.438,9.72 51.502,9.738 cw(c51.587,9.451) 51.544,9.748 51.61,9.757 cw(c51.787,8.54) 51.927,9.762 52.033,9.75 52.393,9.75 55.32,12.677 66.427,12.677 67.975,14.225 71.025,14.225 75.5,18.699 75.5,23 72,26.5 72,29.75 66.281,35.469 65.281,35.469
VCC: Designator2.3 R10.2 R_Power.2 U_1.3 U_SR.16 X_Data_14.9 X_Data_14.11 X_Data_14.13 X_Data_14.15 X_Data_58.1 X_Data_58.3 X_Data_58.5 X_Data_58.7 X_In.7 X_Out.2 | length 341.7
  Top Layer w0.3: U_1.3 24.552,37.948 25.677,36.823 42.781,36.823 43.281,36.323 51.608,36.323 ; U_SR.16 51.608,36.323 ; X_Data_14.15 50.557,4.77 47.937,4.77 X_Data_14.13 45.477,4.77 42.857,4.77 X_Data_14.11 40.397,4.77 37.777,4.77 X_Data_14.9 29.377,6 28.75,6.627 14.682,6.627 8.798,12.511 8.798,27.332 X_In.7 3.343,32.787 3.343,52.843 16.94,66.44 35.947,66.44 X_Data_58.1 37.777,68.27 40.397,68.27 X_Data_58.3 42.857,68.27 45.477,68.27 X_Data_58.5 47.937,68.27 50.557,68.27 X_Data_58.7 ; Designator2.3 63.125,35.125 64.323,36.323 ; R10.2 73.775,41.525 81.5,49.25 85.25,49.25 87,47.5 87,36.956 86.991,36.956 86.991,34.416 X_Out.2 82.25,29.675 ; R_Power.2 82.25,22.05 82.25,29.675 ; 51.608,36.323 64.323,36.323 ; 64.323,36.323 75.927,36.323 82.25,30 82.25,29.675
  Bottom Layer w0.3: X_In.7 5.013,31.143 83.718,31.143 X_Out.2
pads on no net: Designator2.12 U_1.12 U_SR.9 X_In.1 X_Out.8

## Polygon pours and split planes (outlines as drawn)
GND on Top Layer "GND_TOP" (solid, shelved, pour order 0): 0,72.75 0,0 89.25,0 89.25,72.75
GND on Bottom Layer "GND_BOT" (solid, shelved, pour order 3): 7.5,0 7.5,7.5 0,7.5 0,65 7.5,65 7.75,65.25 7.75,72.75 81.5,72.75 81.5,65 89.25,65 89.25,7.5 81.25,7.5 81.25,0

## Silkscreen, mask and mechanical layers (free items; w line width, h text height)
Top Overlay:
  text "VCC" at 52.246,70.004 h0.76 r90
  text "5V" at 54.746,70.004 h0.76 r90
  text "LED-" at 39.496,58.754 h0.76 r90
  text "LED-" at 54.746,58.754 h0.76 r90
  text "PRes8" at 36.996,58.004 h0.76 r90
  text "PRes5" at 52.246,58.004 h0.76 r90
  text "SHIFT" at 8.286,43.529 h0.76
  text "SHIFT" at 77.047,43.529 h0.76
  text "V_Ref" at 69.254,42.556 h0.76
  text "5V" at 8.286,40.779 h0.76
  text "5V" at 79.206,40.779 h0.76
  text "Ser_In" at 8.286,38.406 h0.76
  text "Ser_Out" at 75.754,38.381 h0.76
  text "LED" at 8.286,35.779 h0.76
  text "LED" at 78.444,35.779 h0.76
  text "CLK" at 8.286,33.279 h0.76
  text "CLK" at 78.444,33.279 h0.76
  text "3V3" at 8.286,30.779 h0.76
  text "3V3" at 78.444,30.779 h0.76
  text "GND" at 8.286,28.138 h0.76
  text "GND" at 78.444,28.138 h0.76
  text "PRes1" at 36.996,11.504 h0.76 r90
  text "LED-" at 39.496,11.504 h0.76 r90
  text "PRes4" at 51.996,11.504 h0.76 r90
  text "LED-" at 54.496,11.504 h0.76 r90
  text "PullDown Widerstaende" at 15.254,10.754 h0.76
  text "werden nur bei" at 15.254,9.254 h0.76
  text "nicht genutzten" at 15.254,7.258 h0.76
  text "Sensoren" at 15.254,5.754 h0.76
  text "bestueckt" at 15.254,4.254 h0.76
  text "5V" at 54.746,2.016 h0.76 r90
  text "VCC" at 52.246,1.254 h0.76 r90
Bottom Overlay:
  text "Nur bestuecken" at 20.671,39.554 h0.76
  text "bei letzter Platine" at 20.621,38.104 h0.76
Mechanical 1:
  lines w0.254: 0,72.75 0,0 89.25,0 89.25,72.75 ; 0.127,72.75 89.377,72.75
Bottom Component Center:

## Text inside footprints (layer, text, board x,y; h text height)
X_Data_14: Top Overlay "1" at 33.407,8.032 h1.27; Top Overlay "9" at 33.407,5.492 h1.27
X_Data_58: Top Overlay "1" at 33.407,66.532 h1.27; Top Overlay "9" at 33.407,63.992 h1.27